# EAGLE board hv_gen (EAGLE 6.6.0)
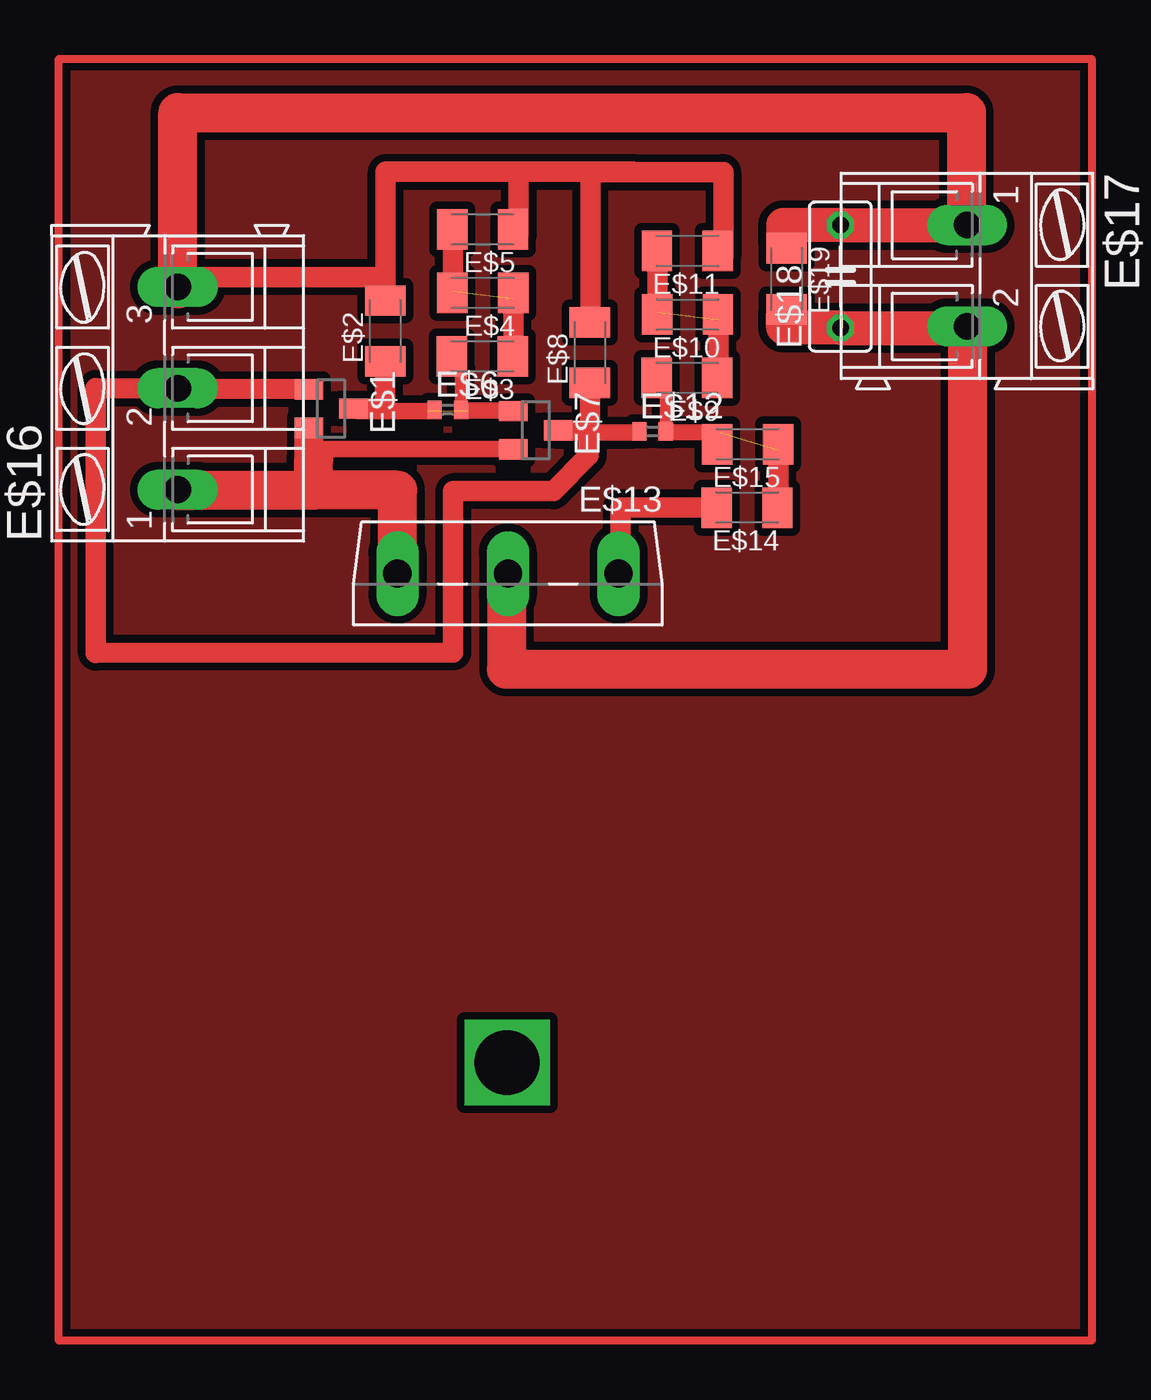
[diagram p0: board, top side]

No outline drawn. Coordinates in mm, seen from the top.
Copper layers (1*16): Top 0.035mm / dielectric 1.5mm / Bottom 0.035mm
Design rules "default *": minimum track width 10mil, minimum drill 24mil, track to track 15mil, track to pad 15mil, pad to pad 15mil, via to via 15mil, smd to smd 15mil, copper to edge 40mil, drill to drill 8mil, minimum pad ring 10mil, minimum via ring 8mil, stop-mask expansion 4mil, vias tented up to drill 0mil, thermal gap 10mil

## Footprints (pad centres in the part's own frame; a part is rotated, then mirrored left to right if it is on the bottom)
SOT23 = smd 1 x 1.4: 1 -0.95,-1.1; 2 0.95,-1.1; 3 0,1.1
C1206K = smd 1.5 x 2: 1 -1.5,0; 2 1.5,0
R0402 = smd 0.7 x 0.9: 1 -0.65,0; 2 0.65,0
SOT93V = drill 1.397 long: B -5.461,-2.54; C 0,-2.54; E 5.461,-2.54
AK300/3 = drill 1.321 long: 1 -5.004,0; 2 0,0; 3 5.004,0
AK300/2 = drill 1.321 long: 1 -2.515,0; 2 2.489,0
C050-030X075 = drill 0.813 octagon: 1 -2.54,0; 2 2.54,0

## Placement (x,y rotation side)
E$1  [SOT23]  14.35,46.36 270 top
E$2  [C1206K]  17.03,50.19 90 top
E$3  [C1206K]  21.82,48.94 180 top
E$4  [C1206K]  21.85,52.07 180 top
E$5  [C1206K]  21.84,55.21 180 top
E$6  [R0402]  20.12,46.3 0 top
E$7  [SOT23]  24.46,45.29 270 top
E$8  [C1206K]  27.14,49.12 90 top
E$9  [C1206K]  31.93,47.87 180 top
E$10  [C1206K]  31.96,51 180 top
E$11  [C1206K]  31.95,54.14 180 top
E$12  [R0402]  30.23,45.23 0 top
E$13  [SOT93V]  23.09,35.67 180 top
E$14  [C1206K]  34.9,41.47 180 top
E$15  [C1206K]  34.93,44.6 180 top
E$16  [AK300/3]  6.78,47.36 90 top
E$17  [AK300/2]  45.76,52.91 270 top
E$18  [C050-030X075]  39.51,52.88 90 top
E$19  [C1206K]  36.85,52.76 270 top

## Library data of the parts
E$1 E$7 = led
E$2-E$5 E$8-E$11 E$14 E$15 E$18 E$19 = rcl
E$6 E$12 = smd-ipc
E$13 = ref-packages
E$16 E$17 = con-ptr500

## Nets
S$20: E$18.2

## Tracks (layer width: path | path; a pad name or v marks a point on that pad's centre or on a via)
S$1
  Top 1.016: 15.27,46.35 17.02,46.35 17.02,48.93
S$2  (1 unrouted)
  Top 0.813: 15.66,46.24 19.12,46.24 | 21.1,46.26 23.46,46.26
S$3
  Top 0.61: 20.8,46.29 20.78,46.29 20.78,48.38
S$4  (1 unrouted)
  Top 1.016: 23.42,48.82 23.37,48.82 23.37,51.79 | 20.37,52.16 20.37,55.13
S$5
  Top 1.016: 17.05,51.79 17.05,58.05 23.62,58.05 | 23.62,58.05 23.62,54.96 | 23.62,58.05 29.26,58.05
S$6
  Top 1.016: 25.38,45.28 27.13,45.28 27.13,47.86
S$7
  Top 0.813: 25.77,45.17 29.23,45.17
S$8
  Top 0.61: 30.91,45.22 30.89,45.22 30.89,47.31
S$9  (1 unrouted)
  Top 1.016: 33.53,47.75 33.48,47.75 33.48,50.72 | 30.48,51.09 30.48,54.06
S$10
  Top 1.016: 27.16,50.72 27.16,58.04 33.73,58.04 33.73,53.89
S$11
  Top 0.813: 23.32,44.35 13.55,44.35 13.55,45.38
S$12
  Top 1.016: 17.02,52.01 17.02,52.86 6.71,52.86
S$13
  Top 1.93: 6.73,42.33 13.5,42.33 | 13.5,42.33 13.5,43.9 | 17.65,38.18 17.65,42.33 13.5,42.33
S$14
  Top 1.016: 13.29,47.32 2.74,47.38 2.74,40.82
S$15  (1 unrouted)
  Top 0.813: 33.58,45.18 31.18,45.19
  Top 1.016: 36.5,41.35 36.45,41.35 36.45,44.32
S$16
  Top 1.016: 33.5,41.47 28.65,41.47 28.65,38.04
S$17
  Top 1.016: 27.08,45.27 27.08,44.03 25.33,42.28 20.38,42.28 20.38,34.32 2.74,34.3 2.73,41.34
S$18
  Top 1.676: 39.54,55.42 36.68,55.42 36.68,54.57
S$19
  Top 1.016: 39.71,50.55 37.52,50.55 37.37,50.92
S$20  (1 unrouted)
  Top 1.016: 39.62,50.34 45.86,50.34 45.91,50.34
  Top 1.676: E$18.2 45.86,55.42 | 39.51,50.34 45.86,50.34
S$21
  Top 1.93: 6.79,52.28 6.79,60.98 45.73,60.98 45.73,55.5
S$22
  Top 1.93: 23.01,38.24 23.01,33.49 45.8,33.49 45.8,50.3
S$23
  Top 1.676: 39.45,50.36 36.68,50.36 36.68,51.07
S$24
  Top 0.406: 0.91,0.33 0.91,63.63 51.92,63.63 51.92,0.33 0.91,0.33
S$25  (via drill 3.2)
  other vias: 23.05,14.06
S$26
  pour Top: 0.94,63.67 51.91,63.67 51.91,5.88 51.91,0.33 1.47,0.33 0.94,0.33
(copper drawn outside any net)
  shapes: Top area x1